# Altium PCB pcb.pcbdoc
Units mm, origin at the board's own origin, x right, y up, seen from the top; angles counter-clockwise.
Board outline 108.84 x 61.04 mm, 2 copper layers (Top Layer, Bottom Layer); 15 components, 20 nets, 46 pads, 0 vias.
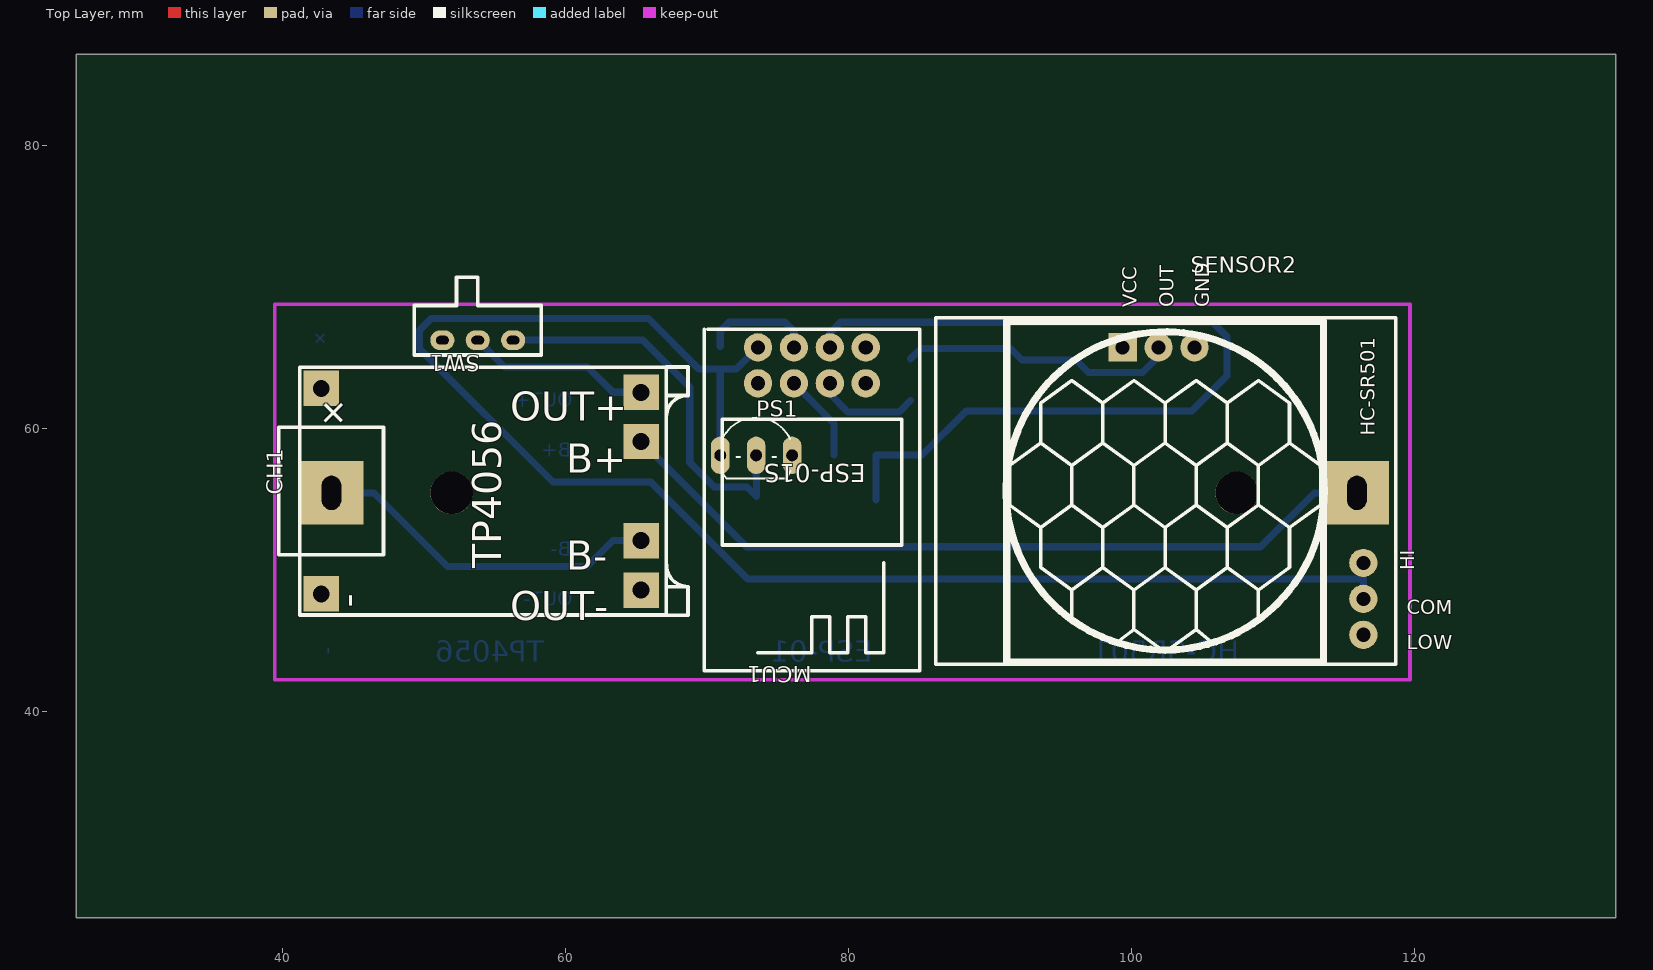
[diagram p0: Top Layer view]
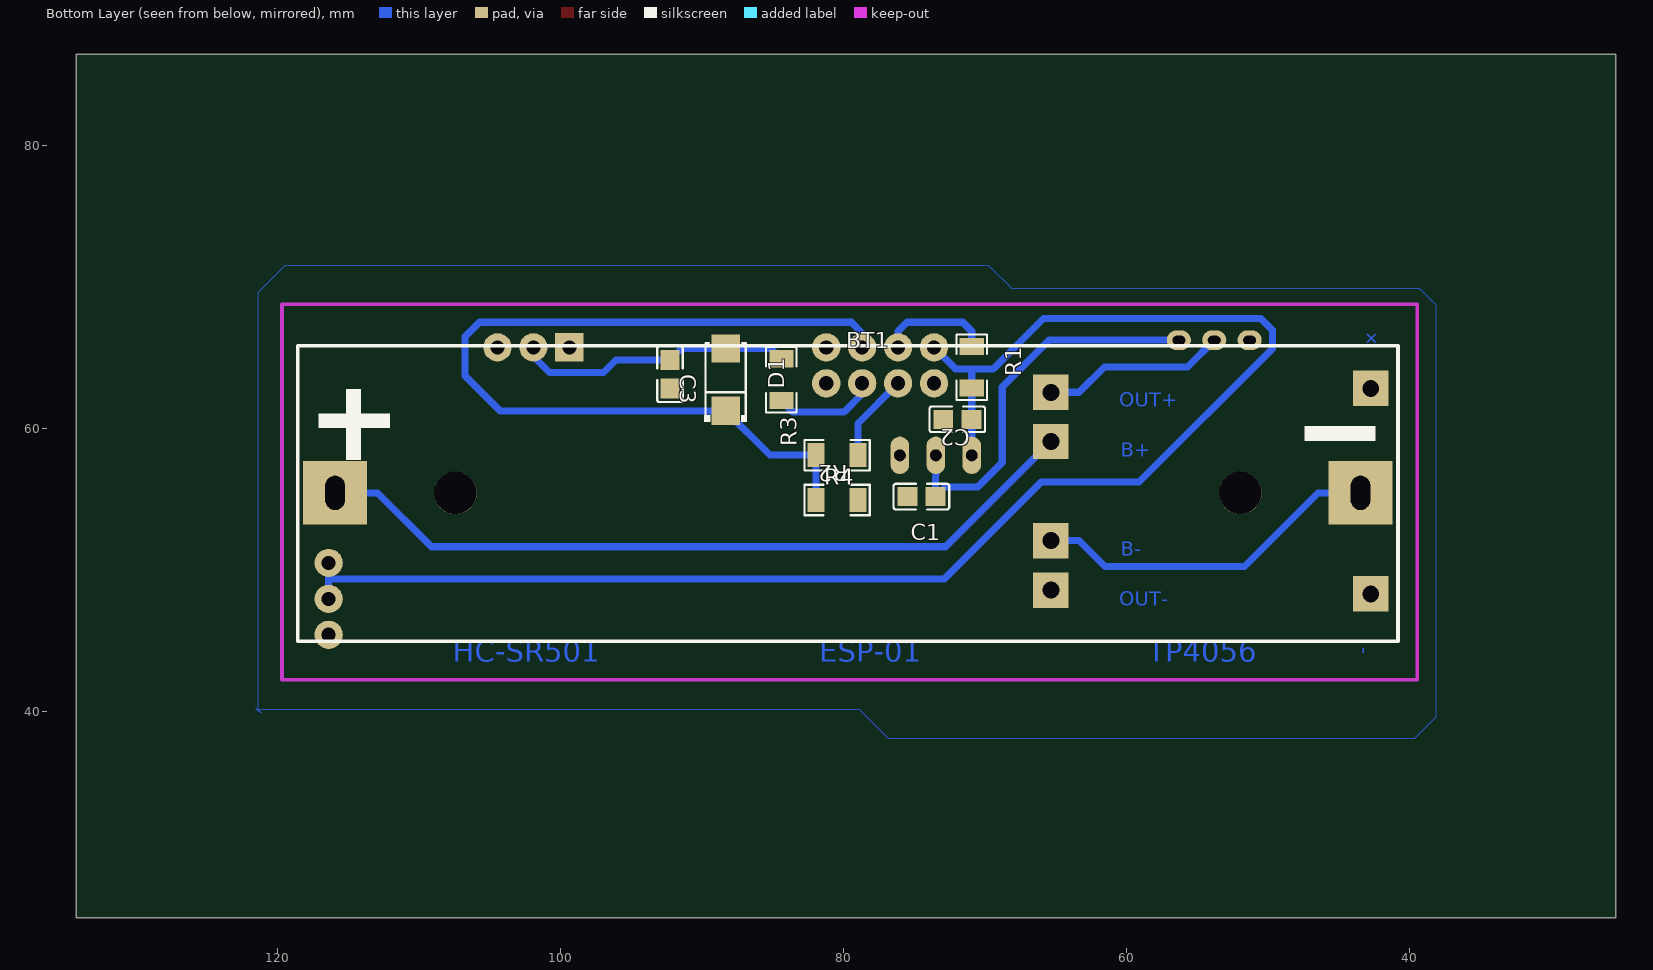
[diagram p1: Bottom Layer view, seen from below]

## Layer stack, top to bottom
Top Layer: signal copper (thickness not stored)
Dielectric: dielectric 0.32, FR-4, Dk 4.8
Bottom Layer: signal copper (thickness not stored)

## Board outline
134.239,25.4 25.4,25.4 25.4,86.444 134.239,86.444

## Components (designator, comment, footprint, x,y, rotation, side; value= is the part's Value field where it differs from the comment)
BT1 "BH-18650-A5BJ001" BAT-TH_18650-A5BJ001 79.692,55.435 r0 bottom
C1 "10uF" C0805 74.486,55.171 r0 bottom
C2 "10uF" C0805 71.945,60.632 r180 bottom
C3 "10uF" C0805 92.266,63.817 r90 bottom
CH1 "TP4056 type-C" "TP4056 TYPE-C MODULE, 18650 1A LIPO BATTERY CHARGING BOARD" 41.212,55.562 r90 top
D1 "SS14-E3/61T" SMA_L4.3-W2.6-LS5.2-RD 88.328,63.436 r270 bottom
MCU1 "ESP-01S" ESP-01S 81.216,63.182 r180 top
PS1 "HT7333-A'" TO92 73.469,58.092 r0 top
R1 "10kΩ" R1206 70.929,64.315 r270 bottom
R2 "1kΩ" R1206 80.454,58.102 r180 bottom
R3 "1kΩ" R1206 84.391,63.436 r270 bottom
R4 "10kΩ" R1206 80.454,54.927 r0 bottom
SENSOR2 "HC-SR501 PIR MOTION SENSOR with no holes" "HC-SR501 PIR MOTION SENSOR WITH NO HOLES (EDITED FROM @RHALF)" 99.377,65.722 r0 top
SW1 "_X001F_MSK-12D191P2T" SW-TH_MSK-12D191P2T 53.785,66.23 r180 top
? "" ? 79.819,71.93 r0 top

## Footprints (in the part's own frame and the unit in brackets; to place one, negate y for a bottom-side part, rotate by r counter-clockwise, add the part's x,y. Pads: shape width x height; smd on the part's side, far side on the other; paste and mask are expansions set on the pad)
BAT-TH_18650-A5BJ001 [mm]
  rect 4.5x4.5 hole 1.38 slot 2.4 at 90 deg unplated paste+0 mask+0.05: 1(36.25,0) 2(-36.25,0)
  round 3 hole 3 unplated paste+0: ""(-27.75,0) ""(27.75,0)
  silkscreen extent -38.9,-10.4 38.9,10.5
C0805 [mm]
  rect 1.41x1.35 smd paste-100 mask+0.051: 1(1,0) 2(-1,0)
  silkscreen extent -1.96,-0.9 1.96,0.9
ESP-01S [mm]
  round 2 hole 1 unplated paste+0 mask+0.051: 1(0,0) 2(2.54,0) 3(5.08,0) 4(7.62,0) 5(7.62,-2.54) 6(5.08,-2.54) 7(2.54,-2.54) 8(0,-2.54)
  silkscreen extent -3.81,-3.81 11.43,20.32
"HC-SR501 PIR MOTION SENSOR WITH NO HOLES (EDITED FROM @RHALF)" [mm]
  rect 2x2 hole 1 unplated paste+0 mask+0.051: 1(0,0)
  round 2 hole 1 unplated paste+0 mask+0.051: 2(2.54,0) 3(5.08,0)
  round 2 hole 1 unplated paste+0 mask+0.102: 4(17.018,-20.32) 5(17.018,-17.78) 6(17.018,-15.24)
  silkscreen extent -13.2,-22.41 19.3,2.09
R1206 [mm]
  rect 1.208x1.701 smd paste-100 mask+0.051: 1(1.479,0) 2(-1.479,0)
  silkscreen extent -2.31,-1.08 2.31,1.08
SMA_L4.3-W2.6-LS5.2-RD [mm]
  rect 2x2 smd paste+0 mask+0.051: 1(2.2,0) 2(-2.2,0)
  silkscreen extent -2.6,-1.5 2.98,1.5
SW-TH_MSK-12D191P2T [mm]
  oval 1.7x1.4 hole 0.6 slot 0.9 at 0 deg unplated paste+0 mask+0.051: 1(-2.5,0) 2(0,0) 3(2.5,0)
  silkscreen extent -4.5,-4.45 4.5,1.05
TO92 [mil]
  oval 52x104 hole 32 slot 32.2 at 90 deg unplated paste+0 mask+2: GND(100,0) IN(0,0) OUT(-100,0)
  silkscreen extent -95,-65 95,105
"TP4056 TYPE-C MODULE, 18650 1A LIPO BATTERY CHARGING BOARD" [mm]
  rect 2.5x2.5 hole 1.2 unplated paste+0 mask+0.051: 1(-7,-24.128) 2(-3.5,-24.128) 3(3.5,-24.128) 4(6.985,-24.13) 5(7.26,-1.508) 6(-7.27,-1.508)
  silkscreen extent -8.77,-27.44 8.77,1.5
? [mm]

## Nets (pads, with @x,y where several pads share a name; then routed paths per layer and width w, separated by ;. In a path a pad name is that pad's centre, name@x,y a point inside that pad or via, vN(x,y) a via of type N, cw(c..) or ccw(c..) an arc to the next point about the centre after c; other vN are vias at no path point)
+3.3V: C2.1 MCU1.5 PS1.OUT R1.1 SENSOR2.5 SENSOR2.6 | length 109.8
  Bottom Layer w0.5: PS1.OUT 70.929,64.191 ; MCU1.5 72.065,64.191 70.929,64.191 ; SENSOR2.5 SENSOR2.6 ; 116.395,49.34 72.875,49.34 66.017,56.197 59.098,56.197 49.675,65.621 49.675,66.934 50.495,67.754 65.849,67.754 69.413,64.191 70.929,64.191
CH1_2: BT1.2 CH1.2 | length 24.8
  Bottom Layer w0.5: BT1.2 46.443,55.435 ; 46.444,55.435 51.651,50.228 61.506,50.228 63.34,52.062 ; 63.339,52.062 CH1.2
CH1_3: BT1.1 CH1.3 | length 55.3
  Bottom Layer w0.5: CH1.3 72.776,51.625 109.131,51.625 112.941,55.435 ; 112.942,55.435 BT1.1
CH1_4: CH1.4 SW1.2 | length 13.1
  Bottom Layer w0.5: SW1.2 55.675,64.34 61.548,64.34 63.341,62.547 CH1.4
CH1_5: CH1.5
CH1_6: CH1.6
GND: C1.1 C2.2 C3.2 CH1.1 MCU1.1 PS1.GND R4.2 SENSOR2.3 | length 0.6
  Top Layer w0.5: SENSOR2.3 104.457,65.683 SENSOR2.3@104.838,65.302
MCU1_4: MCU1.4
MCU1_8: MCU1.8
PS1_IN: C1.2 PS1.IN SW1.1 | length 27.8
  Bottom Layer w0.5: SW1.1 65.468,66.23 68.77,62.928 68.77,57.577 70.503,55.844 72.812,55.844 C1.2 PS1.IN
R1_2: MCU1.6 R1.2 | length 7.9
  Bottom Layer w0.5: R1.2 70.929,66.865 71.564,67.501 75.501,67.501 76.136,66.865 MCU1.6
R2_1: MCU1.3 R2.1 | length 6.3
  Bottom Layer w0.5: MCU1.3 78.976,60.343 R2.1
R2_2: D1.1 MCU1.7 R2.2 R4.1 | length 62.9
  Bottom Layer w0.5: MCU1.7 78.676,66.739 79.438,67.501 105.727,67.501 106.743,66.484 106.743,63.691 104.29,61.237 D1.1 85.194,58.102 R2.2 R4.1
R3_1: MCU1.2 R3.1 | length 7.3
  Bottom Layer w0.5: MCU1.2 78.676,62.42 79.947,61.151 83.584,61.151 R3.1
R3_2: C3.1 D1.2 R3.2 SENSOR2.2 | length 19.6
  Bottom Layer w0.5: R3.2 85.113,65.636 D1.2 91.447,65.636 C3.1 96.092,64.817 96.965,63.944 100.774,63.944 101.917,65.087 SENSOR2.2
S$11799: 
S$78094: 
SENSOR2_1: SENSOR2.1
SENSOR2_4: SENSOR2.4
SW1_3: SW1.3
pads on no net: BT1.

## Polygon pours and split planes (outlines as drawn)
GND on Bottom Layer (solid): 68.072,69.85 69.723,71.501 119.507,71.501 121.412,69.596 121.412,40.132 121.539,40.132 121.158,39.878 121.412,40.132 78.867,40.132 76.835,38.1 39.624,38.1 38.1,39.624 38.1,68.707 39.243,69.85 68.072,69.85

## Other copper
Bottom Layer:
  text "+" at 42.763,65.623 h1 r315
  text "OUT+" at 60.515,61.54 h1
  text "B+" at 60.389,57.984 h1
  text "B-" at 60.389,50.999 h1
  text "OUT-" at 60.515,47.443 h1
  text "-" at 43.616,44.514 h1 r90
  text "TP4056" at 58.483,43.51 h1.5
  text "ESP-01" at 81.724,43.51 h1.5
  text "HC-SR501" at 107.632,43.51 h1.5

## Text inside footprints (layer, text, board x,y; h text height)
CH1: Top Overlay "OUT+" at 56.087,60.532 h2.03; Top Overlay "B+" at 60.024,56.849 h2.03; Top Overlay "B-" at 60.024,49.991 h2.03; Top Overlay "OUT-" at 56.087,46.435 h2.03; Top Overlay "-" at 45.546,47.324 h2.03 r90; Top Overlay "+" at 43.811,62.52 h2.03 r225; Top Overlay "TP4056" at 55.435,50.102 h2.03 r90
SENSOR2: Top Overlay "VCC" at 100.386,68.575 h1.02 r90; Top Overlay "OUT" at 102.986,68.574 h1.02 r90; Top Overlay "GND" at 105.486,68.575 h1.02 r90; Top Overlay "HI" at 119.986,49.974 h1.02 r90; Top Overlay "HC-SR501" at 117.185,59.474 h1.02 r90; Top Overlay "LOW" at 119.478,44.366 h1.02; Top Overlay "COM" at 119.478,46.867 h1.02